# Altium PCB SD171-5.0PCB4.PcbDoc (part 5 of 5)
Units mm, origin at the board's own origin, x right, y up, seen from the top; angles counter-clockwise.
Board outline 152.27 x 99.6 mm, 6 copper layers (Top Layer, InternalPlane1, Mid-Layer 1, Mid-Layer 2, InternalPlane2, Bottom Layer); 398 components, 338 nets, 1867 pads, 652 vias.
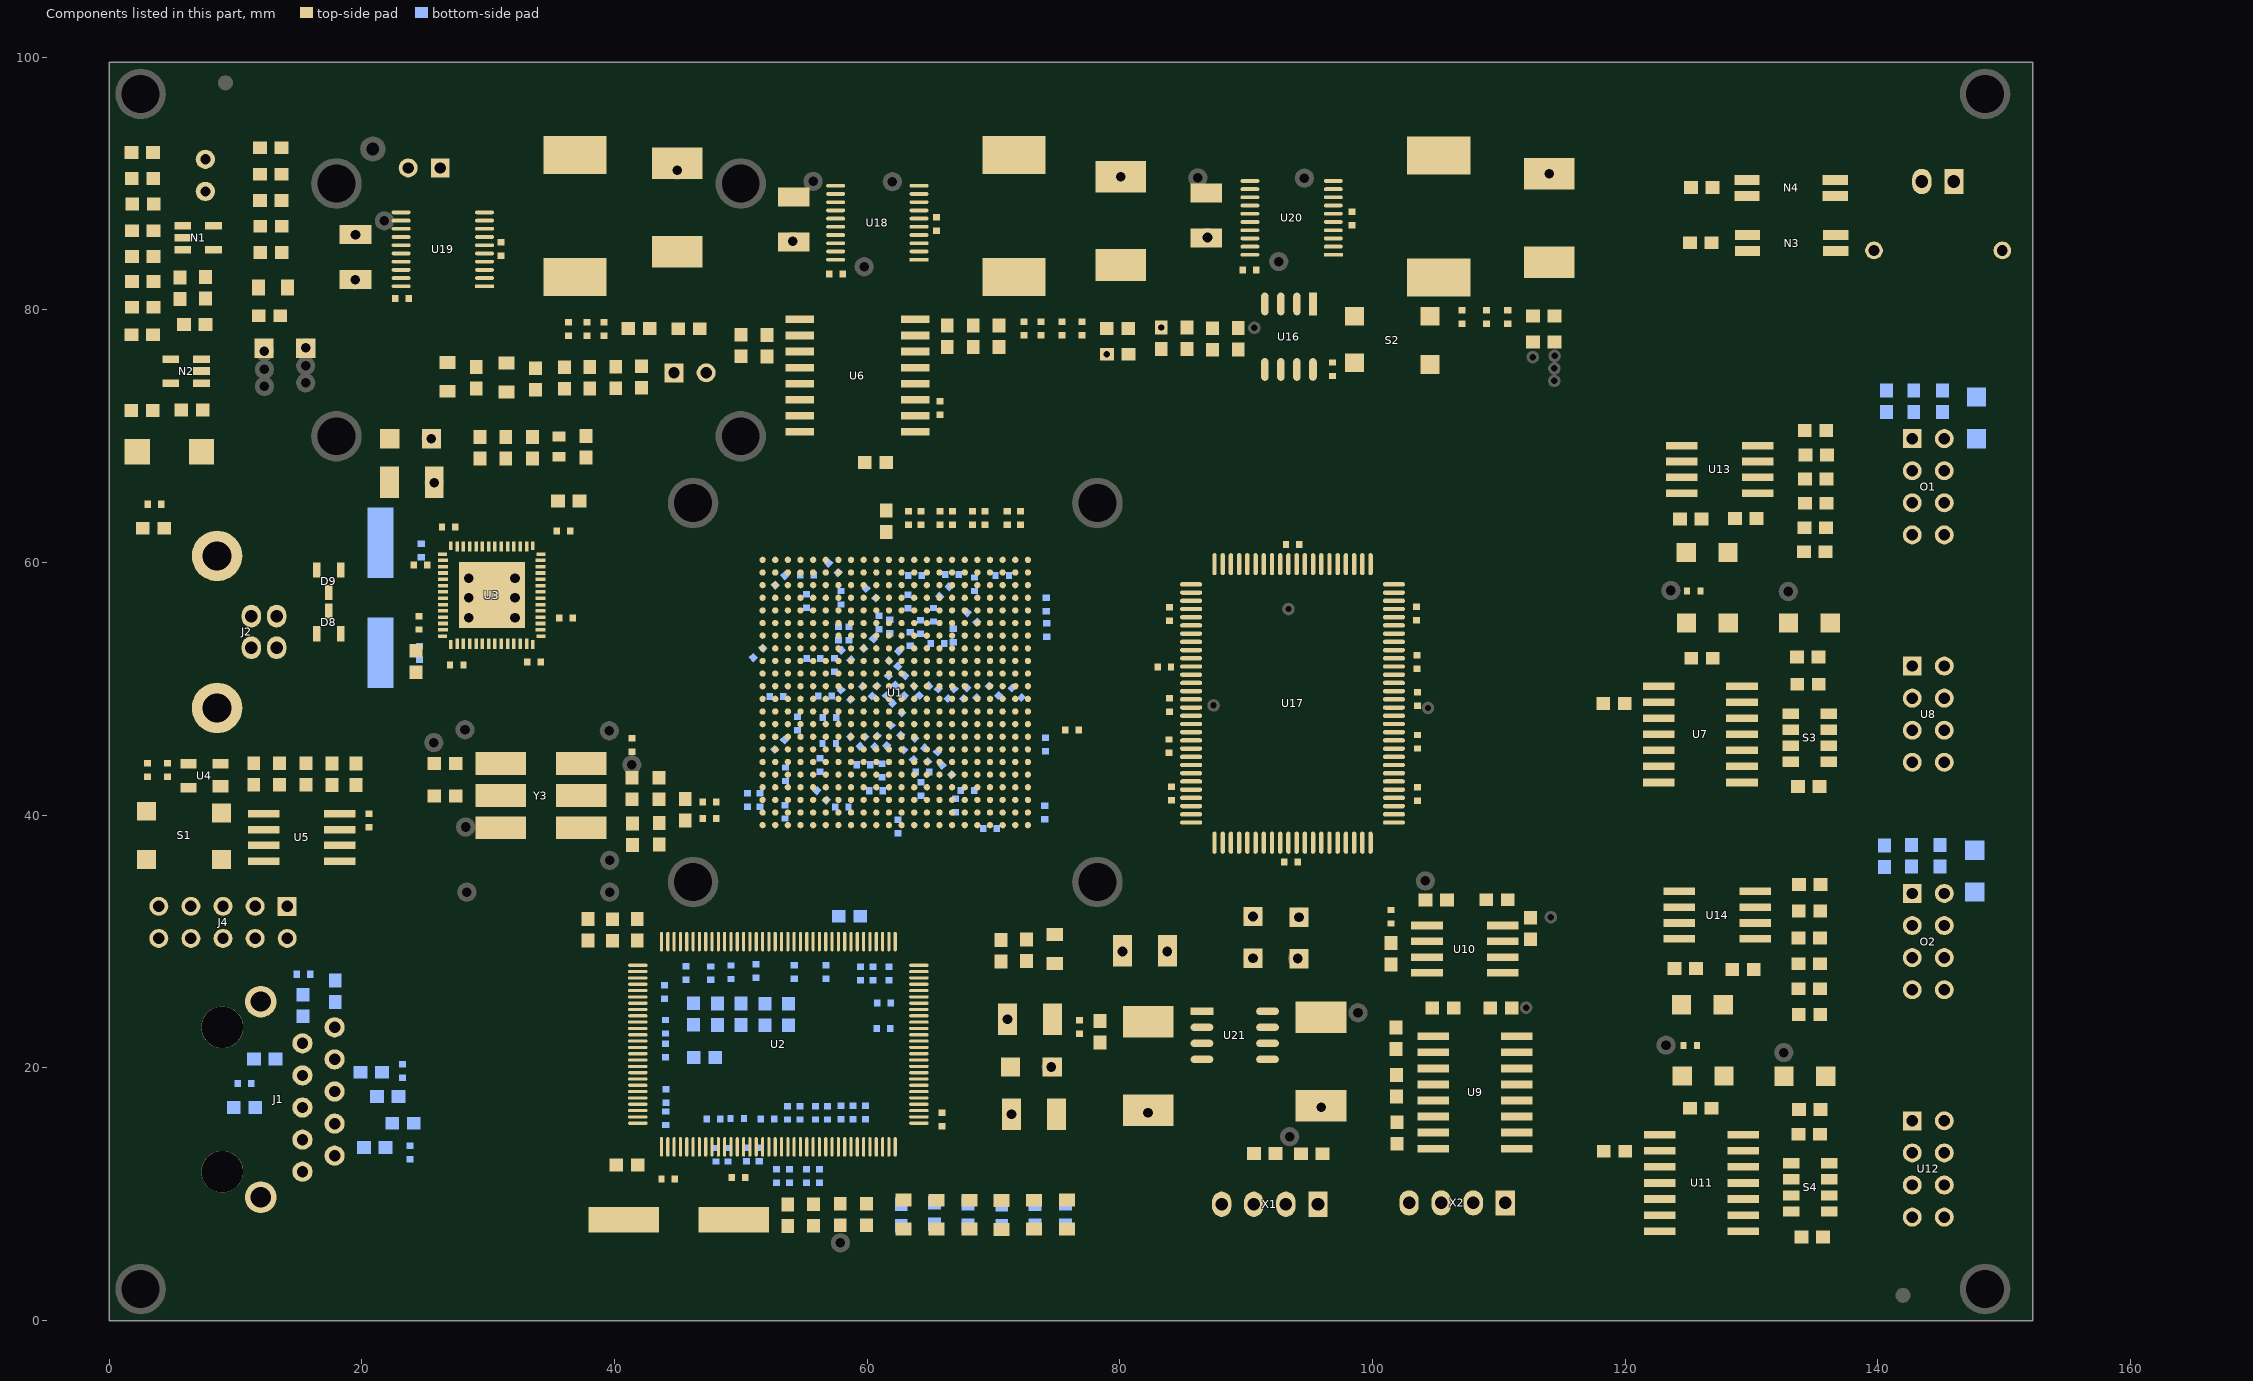
[diagram p9: the components of this part, seen from the top]

## Polygon pours and split planes (outlines as drawn) (continued)
NetC193_1 on Top Layer "Top Layer-No Net" (solid, remove dead copper, pour order 1013): 96.117,85.171 115.903,85.171 116.005,85.069 116.005,84.612 116.005,82.453 115.395,81.843 115.37,81.818 114.506,81.818 114.151,81.818 113.287,80.954 113.236,80.903 113.236,79.024 112.093,79.024 111.89,79.227 111.382,79.735 110.976,79.735 106.581,79.735 105.718,80.599 105.591,80.726 103.533,80.726 99.368,80.726 98.784,81.31 98.326,81.767 98.326,84.282 98.326,84.459 97.945,84.84 97.437,84.84 96.218,84.84 96.117,84.942 96.117,85.171
VDD on Bottom Layer "Top Layer-No Net" (solid, remove dead copper, pour order 1000): 91.265,37.85 92.764,36.352 92.764,36.326 93.399,36.326 94.77,37.698 94.77,37.85 91.189,37.85
E_AVDD on Bottom Layer "Top Layer-No Net" (solid, remove dead copper, pour order 1014): 42.218,12.73 40.211,10.723 39.983,10.723 44.555,10.723 42.548,12.73 42.218,12.73
VCC5V on Bottom Layer "Top Layer-No Net" (solid, remove dead copper, pour order 1015): 149.965,44.683 149.965,42.803 147.856,40.695 147.653,40.492 147.653,39.959 150.269,37.342 150.269,44.683 150.269,44.861
GND on InternalPlane2 (split plane): 130.988,80.772 151.763,80.772 151.763,4.47 0.51,4.47 0.51,95.072 130.988,95.072
VCC3V3 on InternalPlane1 (split plane): 130.962,80.772 151.763,80.772 151.763,4.445 0.51,4.445 0.51,65.055 10.214,65.055 10.253,65.06 10.289,65.075 10.321,65.099 10.829,65.607 10.853,65.639 10.868,65.675 10.873,65.714 10.873,72.496 10.873,77.691 11.242,78.06 12.945,78.06 13.517,77.488 13.517,73.69 13.522,73.651 13.537,73.614 13.561,73.583 14.196,72.948 14.228,72.924 14.264,72.909 14.303,72.904 16.488,72.904 16.527,72.909 16.563,72.924 16.595,72.948 17.255,73.608 17.279,73.64 17.294,73.676 17.299,73.715 17.299,83.951 17.294,83.991 17.279,84.027 17.255,84.058 15.75,85.563 15.75,95.072 130.962,95.072
VCC1V2 on InternalPlane1 (split plane): 182 vertices, not listed, extent 48.694,14.329 117.428,77.018
VDDQ on InternalPlane1 (split plane): 103.96,62.28 104.205,62.035 104.982,61.257 104.982,41.52 99.178,35.716 93.627,35.716 93.588,35.711 93.552,35.695 93.52,35.671 92.606,34.757 92.582,34.726 92.567,34.689 92.562,34.65 92.562,31.665 92.32,31.423 89.474,31.423 83.06,37.837 83.06,56.711 85.107,58.758 85.132,58.761 85.169,58.776 85.2,58.8 88.643,62.243 88.674,62.256 88.705,62.28 89.22,62.794 103.445,62.794
VCC5V on InternalPlane1 (split plane): 15.447,85.501 15.452,85.462 15.468,85.425 15.492,85.394 16.997,83.889 16.997,73.778 16.425,73.206 14.366,73.206 13.819,73.752 13.819,77.551 13.814,77.59 13.799,77.626 13.775,77.658 13.115,78.318 13.083,78.342 13.047,78.357 13.008,78.362 11.179,78.362 11.14,78.357 11.103,78.342 11.072,78.318 10.615,77.861 10.591,77.829 10.576,77.793 10.571,77.754 10.571,72.496 10.571,65.777 10.151,65.357 0.51,65.357 0.51,95.072 15.447,95.072

## Keep-outs
Keep-Out Layer:
  the board outline again, w0.1

## Other copper
Top Layer:
  rectangle net GND: 39.424,33.101 40.389,37.215
  rectangle net GND: 33.023,33.075 39.424,37.215
  rectangle net GND: 25.606,33.05 33.023,39.882
InternalPlane1 (plane layer: these items are gaps in the copper):
  rectangle: 130.962,80.772 152.273,95.428
  rectangle: 0,0 151.841,4.445
  rectangle: 0,95.072 151.892,99.6
  lines w0.3: 0.384,65.206 10.214,65.206 10.722,65.714 10.722,72.496 10.722,77.754 11.179,78.211 13.008,78.211 13.668,77.551 13.668,73.69 14.303,73.055 16.488,73.055 17.148,73.715 17.148,83.951 15.599,85.501 15.599,95.686 15.522,95.762 ; 104.067,62.387 105.134,61.32 105.134,41.457 99.241,35.564 93.627,35.564 92.713,34.65 92.713,31.602 92.383,31.272 89.411,31.272 82.909,37.774 82.909,56.773 85.042,58.907 85.093,58.907 88.573,62.387 88.598,62.387 89.157,62.946 103.508,62.946 104.312,62.142 ; 48.542,14.711 49.076,14.178 62.309,14.178 64.316,16.184 64.316,27.411 65.891,28.986 70.31,28.986 74.12,25.176 83.086,25.176 86.846,21.417 94.288,21.417 101.019,28.148 108.055,28.148 115.522,35.615 115.522,39.501 117.58,41.559 117.58,76.763 117.173,77.17 114.328,77.17 111.941,77.17 111.382,76.611 111.382,41.508 107.216,37.342 107.166,37.342 106.454,36.631 106.454,33.888 105.21,32.643 99.165,32.643 93.907,27.386 90.122,27.386 85.804,31.704 75.771,31.704 72.063,35.412 64.062,35.412 63.579,35.895 63.579,38.054 62.538,39.095 62.538,40.009 62.792,40.263 62.792,44.175 64.798,46.182 66.449,46.182 66.703,46.436 66.703,46.994 66.424,47.274 65.814,47.274 65.637,47.452 65.637,53.04 65.383,53.294 60.531,53.294 59.591,54.233 57.305,54.233 56.975,53.903 56.975,51.947 57.636,51.287 58.423,51.287 58.677,51.033 58.677,50.423 57.686,49.433 57.686,48.544 58.017,48.214 58.474,48.214 58.728,47.96 58.728,45.496 59.007,45.216 61.395,45.216 61.674,44.937 61.674,42.27 60.709,41.305 60.709,39.425 59.744,38.46 59.744,31.196 59.287,30.738 49.228,30.738 48.542,30.053 48.542,26.166 48.542,14.711
InternalPlane2 (plane layer: these items are gaps in the copper):
  rectangle: 130.988,80.772 152.273,95.402
  rectangle: 0,95.072 151.994,99.6
  rectangle: 0,0 152.273,4.47

## Silkscreen, mask and mechanical layers (free items; w line width, h text height)
Top Overlay:
  circle w0.2: c20.879,92.735 r1.168
  lines w0.3: 25.806,93.396 26.899,93.396 ; 26.365,92.939 26.365,93.98
  text "SD171-5.0PCB4  2013.01.08" at 121.183,96.85 h1
  text "GND" at 19.583,95.453 h1

## Dimensions
0,99.6 to 152.273,99.6 on Mechanical 1
0,99.6 to 0,0 on Mechanical 1
-1.96,9.564 to -0.304,0 on Mechanical 1
-1.96,25.356 to -2.278,9.564 on Mechanical 1
2.671,34.058 to -16.205,25.375 on Mechanical 1
-1.695,48.491 to 0,0 on Mechanical 1
-1.695,60.531 to -9.652,48.491 on Mechanical 1
144.635,12 to 152.273,0 on Mechanical 1
144.635,30 to 172.644,12 on Mechanical 1
143.365,48 to 172.669,30 on Mechanical 1
144.635,66 to 172.593,48 on Mechanical 1
146.029,90.167 to 172.593,66 on Mechanical 1

## Text inside footprints (layer, text, board x,y; h text height)
J4: Top Overlay "10" at 4.83,28.216 h0.8 r180; Top Overlay "9" at 2.417,33.296 h0.8 r180; Top Overlay "1" at 16.133,33.296 h0.8 r180; Top Overlay "2" at 16.641,30.756 h0.8 r180